# Altium PCB BuckBoost.PcbDoc (part 1 of 2)
Units mil, origin at the board's own origin, x right, y up, seen from the top; angles counter-clockwise.
Board outline 4724.41 x 2755.91 mil, 2 copper layers (Top Layer, Bottom Layer); 131 components, 89 nets, 408 pads, 961 vias.
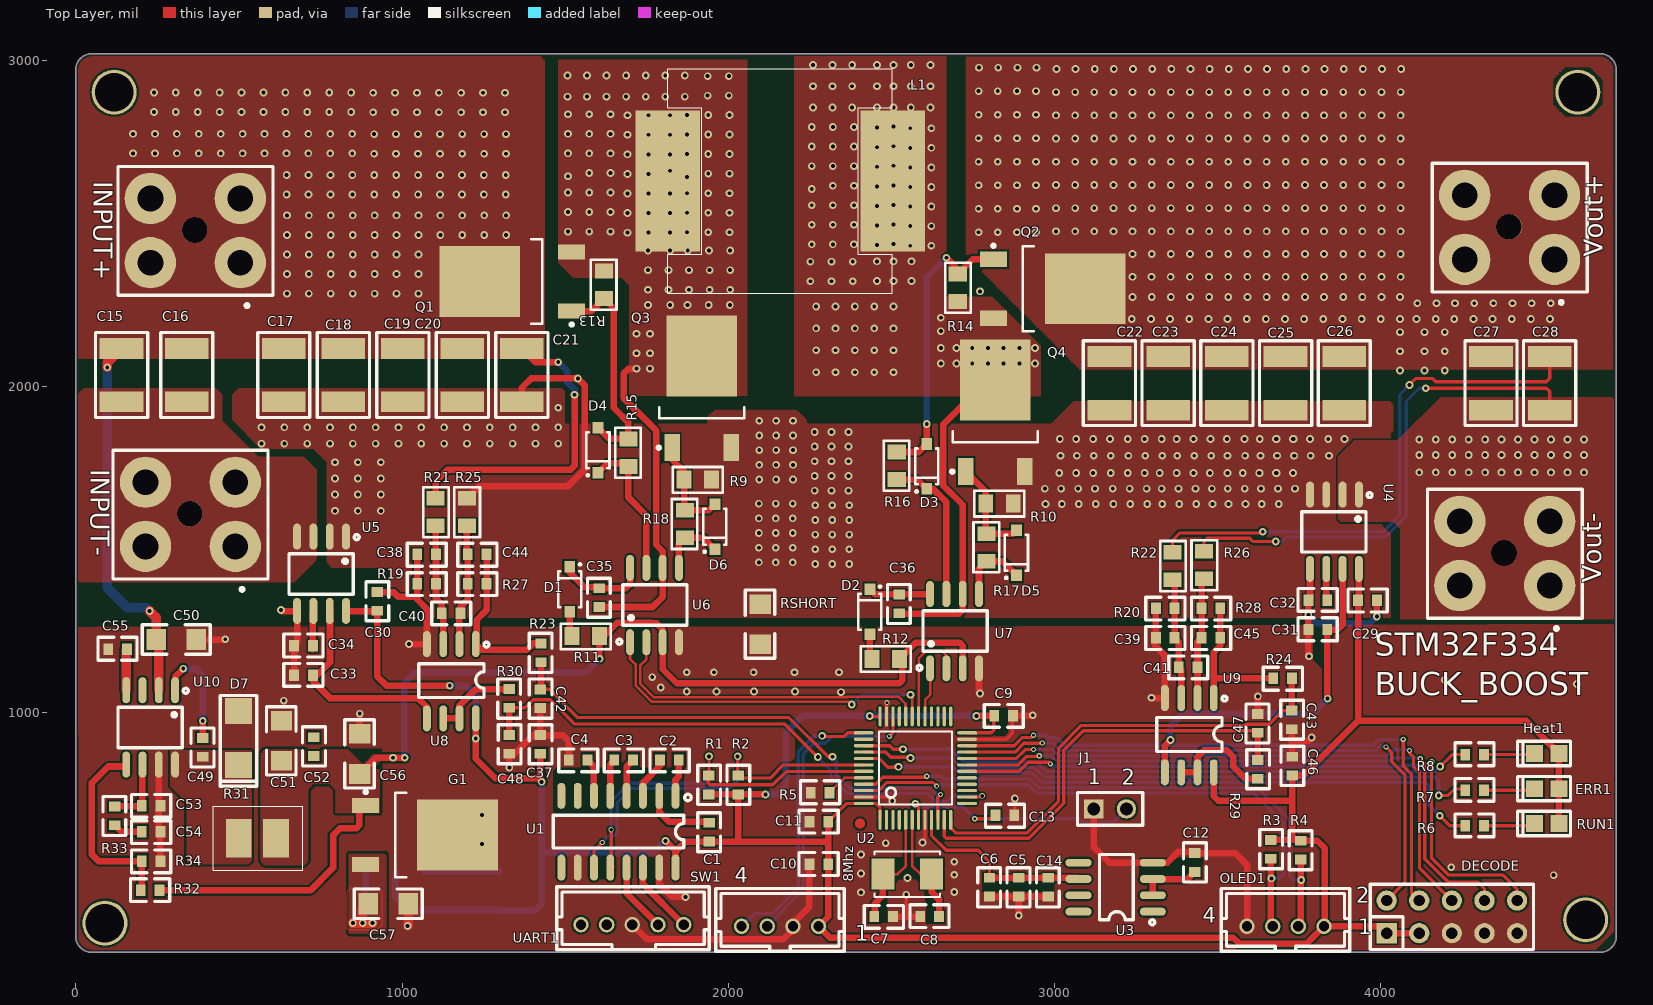
[diagram p0: Top Layer view]
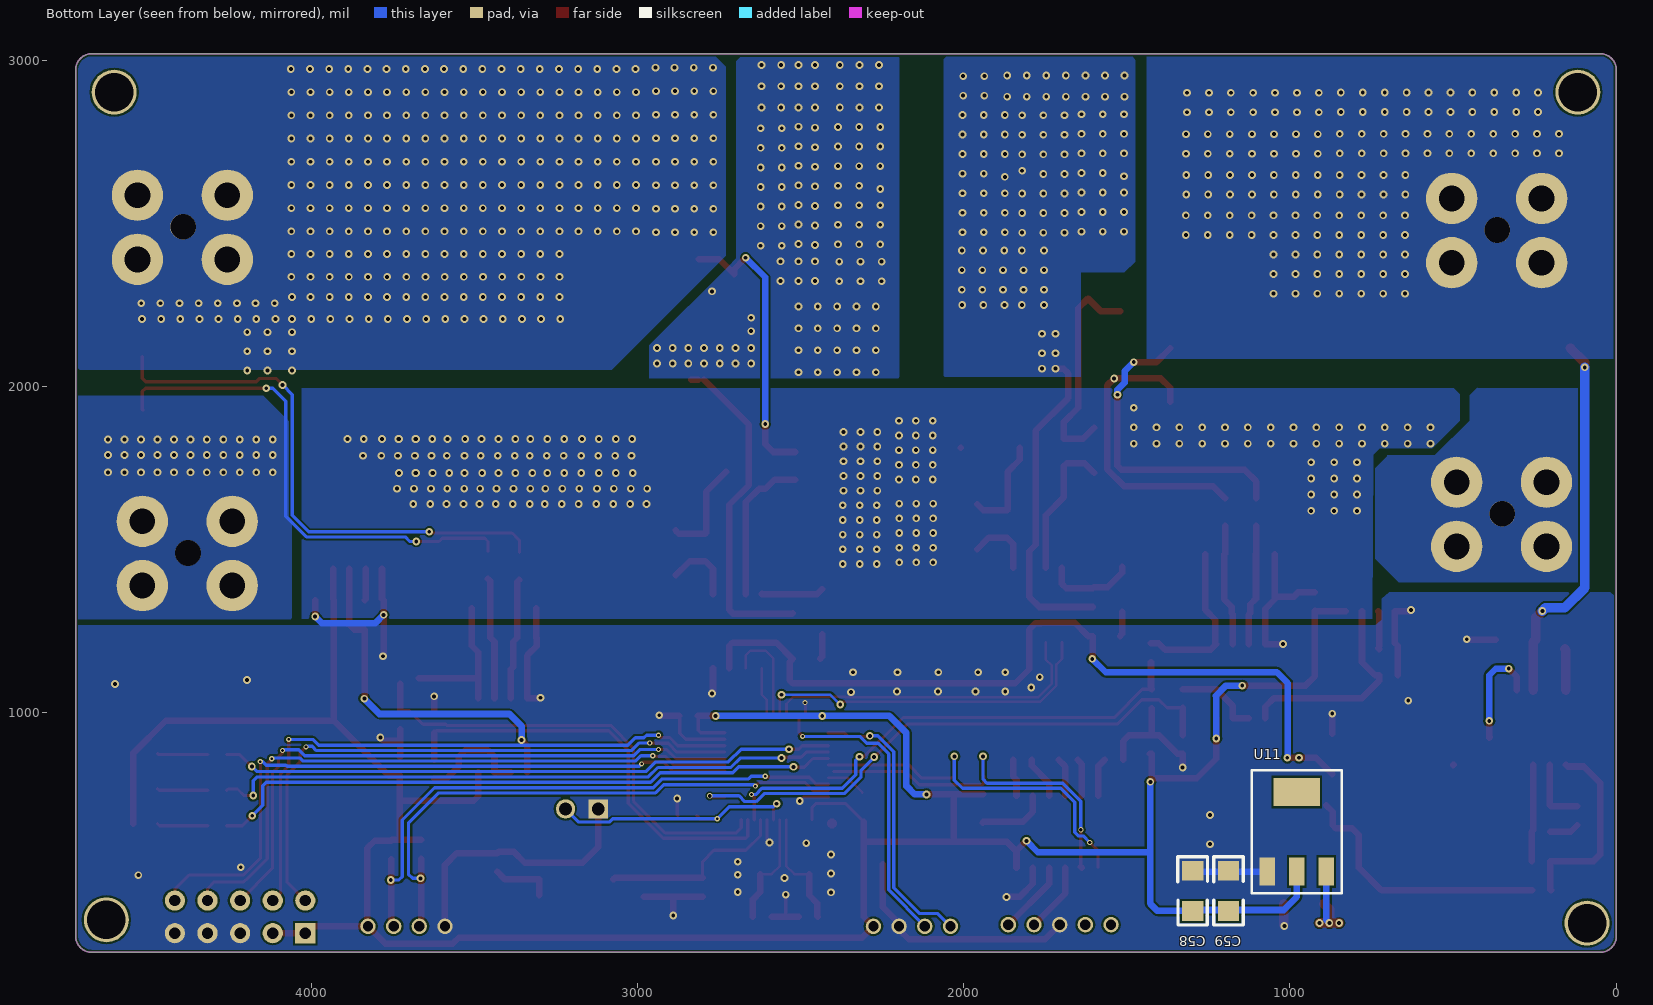
[diagram p1: Bottom Layer view, seen from below]

## Layer stack, top to bottom
Top Solder: solder mask 0.4, Solder Resist, Dk 3.5
Top Layer: signal copper 1.4
Dielectric 1: dielectric 12.6, FR-4, Dk 4.8
Bottom Layer: signal copper 1.4
Bottom Solder: solder mask 0.4, Solder Resist, Dk 3.5

## Board outline
49,265 cw(c49,315) -1,315 -1,2970.91 cw(c49,2970.91) 49,3020.91 4673.41,3020.91 cw(c4673.41,2970.91) 4723.41,2970.91 4723.41,315 cw(c4673.41,315) 4673.41,265

## Design rules (kind name [scope] priority, off if disabled: settings)
Clearance [All] p1: gap=6
PlaneConnect [All] p1: planeconnectstyle=Relief reliefexpansion=20 reliefentries=4 reliefconductorwidth=15 reliefairgap=10
PolygonConnect [(InNet('3.3V') AND InComponent('INPUT_V+1'))] p1: connectstyle=Direct reliefconductorwidth=30 reliefentries=4 polygonreliefangle="90 Angle" airgapwidth=10
PolygonConnect PolygonConnect_1 [All] p2: connectstyle=Direct reliefconductorwidth=20 reliefentries=2 polygonreliefangle="90 Angle" airgapwidth=10
RoutingVias [All] p1: holewidth=28 width=50 viastyle="Through Hole" minholewidth=28 minwidth=50 maxholewidth=28 maxwidth=50
SolderMaskExpansion [All] p1: expansion=4
Width Width_1 [All] p1: maxlimit=30 minlimit=6 preferedwidth=10
Width [All] p2: maxlimit=100 minlimit=99999 preferedwidth=8 toplayer_minwidth=0 bottomlayer_minwidth=0 impedancedriven=TRUE minimp=50.000000 maximp=50.000000 favimp=50.000000 checkconnectedcopper=TRUE
29 further rules are at their usual default settings.

## Classes and differential pairs
component class Power: C15 C16 C17 C18 C19 C20 C21 C22 C23 C24 C25 C26 C27 C28 C29 C30 C31 C32 C33 C34 C35 C36 C37 C38 C39 C40 C41 C42 C43 C44 C45 C46 C47 C48 D1 D2 D3 D4 D5 D6 INPUT+ INPUT- L1 Q1 Q2 Q3 Q4 R9 R10 R11 R12 R13 R14 R15 R16 R17 R18 R19 R20 R21 R22 R23 R24 R25 R26 R27 R28 R29 R30 RSHORT U4 U5 U6 U7 U8 U9 Vout+ Vout-
component class mcu: 8Mhz C1 C2 C3 C4 C5 C6 C7 C8 C9 C10 C11 C12 C13 C14 DECODE ERR1 Heat1 J1 OLED1 R1 R2 R3 R4 R5 R6 R7 R8 RUN1 SW1 U1 U2 U3 UART1
component class amp: C49 C50 C51 C52 C53 C54 C55 C56 C57 C58 C59 D7 G1 R31 R32 R33 R34 U10 U11

## Components (designator, comment, footprint, x,y, rotation, side; value= is the part's Value field where it differs from the comment)
8Mhz "8MHZ" 5032 2549,505 r0 top (schematic designator X1)
C1 "" 0603 1942.33,605 r90 top
C2 "" 0603 1848.54,855 r180 top
C3 "" 0603 1708.47,855 r180 top
C4 "" 0603 1568.4,855 r180 top
C5 "" 0603 2891.11,436 r90 top
C6 "" 0603 2801.1,436 r90 top
C7 "20pF±10%,16V" 0603 2505.53,375 r180 top
C8 "20pF±10%,16V" 0603 2589,375 r0 top
C9 "" 0603 2873.25,991 r180 top
C10 "" 0603 2249,535 r0 top
C11 "" 0603 2249,665 r0 top
C12 "" 0603 3430,569.48 r270 top
C13 "100nF±10%,50V" 0603 2877,685 r180 top
C14 "" 0603 2981.12,436 r90 top
C15 "4.7uF±10%,50V" 1812 139.78,2035 r90 top
C16 "4.7uF±10%,50V" 1812 339.78,2035 r90 top
C17 "4.7uF±10%,50V" 1812 637.27,2035 r90 top
C18 "4.7uF±10%,50V" 1812 819.78,2035 r90 top
C19 "4.7uF±10%,50V" 1812 1002.29,2035 r90 top
C20 "4.7uF±10%,50V" 1812 1184.8,2035 r90 top
C21 "4.7uF±10%,50V" 1812 1367.3,2035 r90 top locked
C22 "4.7uF±10%,50V" 1812 3168.97,2010 r90 top
C23 "4.7uF±10%,50V" 1812 3348.98,2010 r90 top
C24 "4.7uF±10%,50V" 1812 3528.99,2010 r90 top
C25 "4.7uF±10%,50V" 1812 3709,2010 r90 top
C26 "4.7uF±10%,50V" 1812 3889.01,2010 r90 top
C27 "4.7uF±10%,50V" 1812 4338.99,2010 r90 top
C28 "4.7uF±10%,50V" 1812 4519,2010 r90 top
C29 "100nF,16V" 0603 3989,1345 r180 top
C30 "100nF,16V" 0603 923.4,1370 r270 top
C31 "10nf" 0603 3779,1254.99 r0 top
C32 "100nF,16V" 0603 3779,1345 r0 top
C33 "10nf" 0603 669,1114.99 r0 top
C34 "100nF,16V" 0603 669,1205 r0 top
C35 "100nF,16V" 0603 1604.48,1324.07 r90 top
C36 "100nF,16V" 0603 2524.6,1305 r90 top
C37 "" 0603 1424,931.45 r270 top
C38 "" 0603 1104,1485.39 r180 top
C39 "" 0603 3368.93,1229.99 r180 top
C40 "" 0603 1179,1305.37 r180 top
C41 "" 0603 3439,1139.98 r180 top
C42 "" 0603 1424,1071.53 r270 top
C43 "" 0603 3728.4,1006.53 r270 top
C44 "" 0603 1259,1485.39 r180 top
C45 "" 0603 3509,1229.99 r180 top
C46 "" 0603 3729,865 r270 top
C47 "" 0603 3624,938.47 r90 top
C48 "" 0603 1329,931.53 r270 top
C49 "100nf" 0603 389,865 r90 top
C50 "10uf±10%,50V" 1206 369,1225 r180 top
C51 "10uf±10%,50V" 1206 629,975 r270 top
C52 "100nf" 0603 729,925 r270 top
C53 "10pf" 0603 259,715 r180 top
C54 "1nf" 0603 259,635 r180 top
C55 "10nF,16V" 0603 99,1195 r0 top
C56 "10uf±10%,50V" 1206 869,935 r270 top
C57 "10uf±10%,50V" 1206 1019,415 r180 top
C58 "10uf±10%,50V" 1206 1299,515 r270 bottom
C59 "10uf±10%,50V" 1206 1189,515 r270 bottom
D1 "1N4148W" SOD-123 1514,1377.95 r270 top
D2 "1N4148W" SOD-123 2434.12,1310 r270 top
D3 "1N4148W" SOD-123 2609,1755 r90 top
D4 "1N4148W" SOD-123 1600.78,1805 r90 top
D5 "1N4148W" SOD-123 2884,1490 r90 top
D6 "1N4148W" SOD-123 1959,1570.44 r90 top
D7 "SS15" SMA 499,1005 r270 top
DECODE "10芯" IDC-10 4019,324 r0 top
ERR1 "RED" 0805LED 4510,767 r180 top
G1 "LM78M05CDT" TO-252 1029,625 r270 top
Heat1 "翠绿色" 0805LED 4510,874.99 r180 top
INPUT+ "AO-08/4J-N1" A076 504,2380 r90 top (schematic designator INPUT_V+1)
INPUT- "AO-08/4J-N1" A076 489,1510 r90 top (schematic designator INPUT_V-1)
J1 "1*2Pin" HDR1X2 3121,705.01 r0 top
L1 "1mhH  6A" 1770-inductor 2159,2630 r0 top locked
OLED1 "4针" SIP-4 3709,345 r180 top
Q1 "IRFR1205PBF" TO-252AA 1379,2322.23 r90 top
Q2 "IRFR1205PBF" TO-252AA 2954,2300 r270 top
Q3 "IRFR1205PBF" TO-252AA 1919,1953.42 r0 top
Q4 "IRFR1205PBF" TO-252AA 2819,1880 r0 top
R1 "" 0603 1940.33,807 r270 top
R2 "" 0603 2030.34,807 r270 top
R3 "" 0603 3664,610 r270 top
R4 "" 0603 3756.01,550 r90 top
R5 "10R±1%,0603" 0603 2253.4,755.01 r0 top
R6 "" 0603 4260,653.59 r0 top
R7 "" 0603 4260,762.09 r0 top
R8 "" 0603 4260,871.59 r0 top
R9 "10K" 0805r 1949,1715 r180 top
R10 "10K" 0805r 2874,1641.58 r180 top
R11 "Rboot" 0805r 1605.23,1235 r180 top
R12 "Rboot" 0805r 2525.23,1165 r180 top
R13 "10K" 0805R 1619.03,2270 r90 top
R14 "10K" 0805r 2704,2345 r270 top
R15 "10K±0.1%,0805" 0805r 1694,1755 r90 top
R16 "10K±0.1%,0805" 0805r 2517.19,1715 r90 top
R17 "10K±0.1%,0805" 0805r 2792.19,1464.69 r90 top
R18 "10K±0.1%,0805" 0805r 1867.19,1536.31 r90 top
R19 "10K±5%,0603" 0603 1104,1395.38 r180 top
R20 "10K±5%,0603" 0603 3368.93,1320 r180 top
R21 "10K±0.1%,0805" 0805r 1102.73,1657.34 r270 top
R22 "10K±0.1%,0805" 0805r 3362.73,1491.95 r270 top
R23 "100R" 0603 1426,1155 r90 top
R24 "100R" 0603 3729,1105 r180 top
R25 "10K±0.1%,0805" 0805r 1199,1657.34 r270 top
R26 "10K±0.1%,0805" 0805r 3459,1495 r270 top
R27 "10K±5%,0603" 0603 1259,1395.38 r180 top
R28 "10K±5%,0603" 0603 3509,1320 r180 top
R29 "100R" 0603 3624,855 r270 top
R30 "100R" 0603 1329,1015 r90 top
R31 "1mH,800mA" 0603_induct 499,615 r0 top
R32 "10K" 0603 199,455 r0 top
R33 "26K" 0603 119,655 r90 top
R34 "740" 0603 259,545 r180 top
RSHORT "0R±1%,1206" 1206 2097,1333 r270 top
RUN1 "翠绿色" 0805LED 4510,660 r180 top
SW1 "4针" SIP-4 2159,345 r180 top
U1 "MAX3232ESE" SOP-16 1838.4,745.15 r180 top
U2 "STM32F334C8T6" LQFP48_L 2574,830 r90 top locked
U3 "REF193GS" SO-8 3302,390 r180 top
U4 "ACS724" SOIC-8 3859,1555 r270 top
U5 "ACS724" SOIC-8 753,1426 r270 top
U6 "UCC27712" SOIC-8 1774,1330 r90 top
U7 "UCC27712" SOIC-8 2694,1250 r90 top
U8 "LM2904D" SO-8 1226,1210.36 r270 top
U9 "LM2904D" SO-8 3489,1044.97 r270 top
U10 "TPS54331" SOIC-8 229,955 r270 top
U11 "SPX1117M3-L-1-5" SOT-223 979,635 r180 bottom
UART1 "5针" SIP-5-2 1863.4,350 r180 top
Vout+ "AO-08/4J-N1" A076 4534,2390 r90 top locked (schematic designator VOUT_V+1)
Vout- "AO-08/4J-N1" A076 4519,1390 r90 top (schematic designator VOUT_V-1)

## Footprints (in the part's own frame and the unit in brackets; to place one, negate y for a bottom-side part, rotate by r counter-clockwise, add the part's x,y. Pads: shape width x height; smd on the part's side, far side on the other; paste and mask are expansions set on the pad)
0603 [mil] "SMD0603"
  rect 30x35 smd: 1(0,0) 2(57.56,0)
  silkscreen extent -32,-34 88,36
0603_induct [mm]
  rect 2x3 smd: 1(0,0) 2(2.9,0)
  silkscreen extent -2,-2.5 5,2.5
0805LED [mm]
  rect 1.3x1.3 smd: 1(-0.95,0) 2(0.95,0)
  silkscreen extent -1.85,-0.95 2.29,0.95
0805r [mil]
  rect 45x56 smd: 1(0,0) 2(84.37,0)
  silkscreen extent -34,-38 119,40, body extent 4,-25 82,25, height 20
0805R [mil]
  rect 45x56 smd: 1(0,0) 2(84.37,0)
  silkscreen extent -34,-38 119,40, body extent 4,-25 82,25, height 20
1206 [mil]
  rect 60x65 smd: 1(0,1) 2(122.99,1)
  silkscreen extent -43,-45 166,46, body extent -1,-31 125,32, height 37
1770-inductor [mm]
  rect 5x11 smd: 1(-8.75,0) 2(8.776,0)
  silkscreen extent -8.76,-8.75 8.75,8.75
1812 [mm] "Chip ; Body 4.5 x 3.2 mm (LxW typ)"
  rect 1.6x3.4 smd: 1(-2.087,0)
  rect 1.65x3.4 smd: 2(2.087,0)
  silkscreen extent -3.29,-2.03 3.31,2.03, body extent -2.1,-1.47 2.4,1.73, height 1.6
5032 [mm] "5.0mm*3.2mm*1.5mm"
  rect 1.8x2.4 smd: 1(-1.9,0) 2(1.9,0)
  silkscreen extent -2.54,-1.78 2.54,1.78
A076 [mm]
  round 4 hole 2: 1(-0.003,0.002) 2(4.997,0.002) 3(4.997,7.002) 4(-0.003,7.002)
  round 2 hole 2: 5(2.537,3.558)
  silkscreen extent -3.49,-2.54 7.49,9.53
HDR1X2 [mm] "Connector; Header; 2 Position"
  rect 1.5x1.5 hole 1: 1(0,0)
  round 1.5 hole 1: 2(2.54,0)
  silkscreen extent -1.27,-1.27 3.81,1.27, body extent -1.27,-1.27 3.81,1.27, height 6.54
IDC-10 [mil]
  rect 62x62 hole 35: 1(0,0)
  round 62 hole 35: 2(0,100) 3(100,0) 4(100,100) 5(200,0) 6(200,100) 7(300,0) 8(300,100) 9(400,0) 10(400,100)
  silkscreen extent -50,-50 450,150
LQFP48_L [mm] "Thin QFP, 48-Leads, Body 7x7mm, Pitch 0.5mm, IPC High Density"
  oval 1.55x0.25 smd: 1(-4.025,2.75) 2(-4.025,2.25) 3(-4.025,1.75) 4(-4.025,1.25) 5(-4.025,0.75) 6(-4.025,0.25) 7(-4.025,-0.25) 8(-4.025,-0.75) 9(-4.025,-1.25) 10(-4.025,-1.75) 11(-4.025,-2.25) 12(-4.025,-2.75) 25(4.025,-2.75) 26(4.025,-2.25) 27(4.025,-1.75) 28(4.025,-1.25) 29(4.025,-0.75) 30(4.025,-0.25) 31(4.025,0.25) 32(4.025,0.75) 33(4.025,1.25) 34(4.025,1.75) 35(4.025,2.25) 36(4.025,2.75)
  oval 0.25x1.55 smd: 13(-2.75,-4.025) 14(-2.25,-4.025) 15(-1.75,-4.025) 16(-1.25,-4.025) 17(-0.75,-4.025) 18(-0.25,-4.025) 19(0.25,-4.025) 20(0.75,-4.025) 21(1.25,-4.025) 22(1.75,-4.025) 23(2.25,-4.025) 24(2.75,-4.025) 37(2.75,4.025) 38(2.25,4.025) 39(1.75,4.025) 40(1.25,4.025) 41(0.75,4.025) 42(0.25,4.025) 43(-0.25,4.025) 44(-0.75,4.025) 45(-1.25,4.025) 46(-1.75,4.025) 47(-2.25,4.025) 48(-2.75,4.025)
  Top Layer region: -3.943,4.252 -3.937,4.318 -3.943,4.384 -3.96,4.448 -3.988,4.508 -4.026,4.563 -4.073,4.61 -4.127,4.648 -4.188,4.676 -4.252,4.693 -4.318,4.699 -4.384,4.693 -4.448,4.676 -4.508,4.648 -4.563,4.61 -4.61,4.563 -4.648,4.508 -4.676,4.448 -4.693,4.384 -4.699,4.318 -4.693,4.252 -4.676,4.188 -4.648,4.127 -4.61,4.073 -4.563,4.026 -4.508,3.988 -4.448,3.96 -4.384,3.943 -4.318,3.937 -4.252,3.943 -4.188,3.96 -4.127,3.988 -4.073,4.026 -4.026,4.073 -3.988,4.127 -3.96,4.188
  silkscreen extent -2.85,-2.85 2.85,2.85, body extent -3.5,-3.5 3.5,3.5, height 1.6
SIP-4 [mm]
  round 1.2 hole 0.8: 1(-3,0) 2(-1,0) 3(1,0) 4(3,0)
  silkscreen extent -5,-2.95 5,1.95, body extent -4.97,-2.79 4.93,1.71, height 6
SIP-5-2 [mm]
  round 1.2 hole 0.8: 1(0,0) 2(2,0) 3(4,0) 4(6,0) 5(8,0)
  silkscreen extent -2,-2.95 9.88,1.95
SMA [mm]
  rect 2x2.1 smd: 1(0,0) 2(4.2,0)
  silkscreen extent -1.22,-1.44 5.86,1.41, body extent -0.5,-1.32 4.7,1.28, height 2.5
SO-8 [mil]
  oval 80x24 smd: 1(0,0) 2(0,-50) 3(0,-100) 4(0,-150) 5(227.87,-150) 6(227.87,-100) 7(227.87,-50) 8(227.87,0)
  silkscreen extent -6,-175 164,40, body extent -4,-171 232,21, height 67
SOD-123 [mm]
  rect 0.9x0.85 smd: 1(1.75,0.003) 2(-1.75,0.003)
  silkscreen extent -2.03,-0.9 1.4,0.9, body extent -1.85,-0.8 1.85,0.8, height 1.25
SOIC-8 [mil]
  oval 80x24 smd: 1(-113.94,75) 2(-113.94,25) 3(-113.94,-25) 4(-113.94,-75) 5(113.94,-75) 6(113.94,-25) 7(113.94,25) 8(113.94,75)
  silkscreen extent -120,-100 63,115, body extent -117,-99 119,94, height 67
SOP-16 [mil]
  oval 24x80 smd: 1(0,0) 2(50,0) 3(100,0) 4(150,0) 5(200,0) 6(250,0) 7(300,0) 8(350,0) 9(350,220) 10(300,220) 11(250,220) 12(200,220) 13(150,220) 14(100,220) 15(50,220) 16(0,220)
  silkscreen extent -48,-5 375,160, body extent -20,-13 372,229, height 74
SOT-223 [mm] "电源芯片-AS1117M3-X"
  rect 1.2x2.2 smd: 1(-2.3,-3.1) 2(0,-3.1) 3(2.3,-3.1)
  rect 3.6x2.2 smd: 4(0,3.1)
  silkscreen extent -3.5,-4.8 3.5,4.8, body extent -3.25,-3.5 3.25,3.46, height 1.4
TO-252 [mm]
  rect 1.2x2.1 smd: 1(-2.3,-3.575) 3(2.3,-3.575)
  rect 5.5x6.3 smd: 2(0,3.575)
  silkscreen extent -3.47,-3.7 3.3,-0.43, body extent -3.37,-3.92 3.37,6.18, height 2.37
TO-252AA [mm]
  rect 5.5x6.3 smd: D(0,3.575)
  rect 1.2x2.1 smd: G(-2.3,-3.575) S(2.3,-3.575)
  silkscreen extent -3.47,-3.7 3.3,-0.42, body extent -3.37,-3.92 3.37,6.18, height 2.37

## Part data
8Mhz: library part XTAL_SMD
C1 C2 C3 C4 C5 C6 C9 C10 C11 C12 C13 C14 C37 C38 C39 C40 C41 C42 C43 C44 C45 C46 C47 C48: library part 贴片电容,0603,100nF±10%,50V, "贴片电容"
C7 C8: library part 贴片电容,0603,20pF±10%,16V, "贴片电容"
C15 C16 C17 C18 C19 C20 C21 C22 C23 C24 C25 C26 C27 C28: library part 贴片电容,1812,4.7uF±10%,50V,X7R系列,TDK, "贴片电容"
C29 C30 C31 C32 C33 C34 C35 C36: library part 贴片电容,0603,100nF,16V, "贴片电容"
C49 C52 C53 C54 C55: library part 贴片电容,0603,10nF±10%,16V, "贴片电容"
C50 C51 C56 C57 C58 C59: library part 贴片电容,1206,10uf±10%,50V, "贴片电容"
D1 D2 D3 D4 D5 D6: library part 整流二极管,1N4148W,100V,150mA,SOD-123, "整流二极管"
D7: library part 肖特基二极管,SS15,50V,1A,SMA, "肖特基二极管"
DECODE: library part 双列排针母座,10芯,2.54mm, "双列排针母座"
ERR1 Heat1 RUN1: library part 发光二极管,翠绿色,JLF-0805-1-GC,0805, "发光二极管"
G1: library part 电压转换器,LM78M05CDT,TO-252, "电压转换器"
INPUT+ INPUT- Vout+ Vout-: library part AO-08/4J-N1，7.8X7.8mm,DIP-4,M3螺纹孔,中心距5X7mm,表面镀锡, "PCB接线端子"
J1: library part 单列直脚排针,2芯,2.54mm,HDR1X2, "单列直脚排针"
L1 R31: library part 1mH,800mA,0810, "贴片电感"
OLED1 SW1: library part 条形连接器,PH(2.0),4针直针,间距2.00mm,SIP-4, "条形连接器"
Q1 Q2 Q3 Q4: library part MOSFET功率管,IRFR1205PBF,55V,44A,27mR,NPN,TO-252AA, "MOSFET功率管"
R1 R2 R3 R4 R5 R6 R7 R8: library part 10R±1%,1/10W,0603, "贴片电阻"
R9 R10 R11 R12 R13 R14: library part 4.7R±1%,MEF0207,0.5W,25PPM,品牌:EBG, "圆柱形精密贴片电阻"
R15 R16 R17 R18 R21 R22 R25 R26: library part 10K±0.1%,1/8w,0805, "贴片电阻"
R19 R20 R23 R24 R27 R28 R29 R30: library part 10K±5%,1/10W,0603, "贴片电阻"
R32 R33 R34: library part 6.2K±1%,1/10W,0603, "贴片电阻"
RSHORT: library part 0R±5%,1/4W,1206, "贴片电阻"
U1: library part RS232收发器,MAX3232ESE，SOP-16, "RS232收发器"
U2: library part STM32F334Cx, "STM32F334Cx"
U3: library part 电源基准芯片,REF193GS,3V,±10mV,SO-8, "电源基准芯片"
U4 U5: "电流传感器"
U8 U9: library part 运算放大器,LM2904D,SO-8, "运算放大器"
U10: library part TPS54331-sop8
U11: library part 电压转换器,SPX1117M3-L-1-5,SOT-223,环保, "电压转换器"
UART1: library part 条形连接器,PH(2.0),5针直针,间距2.00mm,SIP-5-2, "条形连接器"

## Free pads (board coordinates)
  round 137.8 hole 118.11: 0(89,355) 0(117.11,2902.8) 0(4605.3,2902.8) 0(4629,365)

## Via types
v1: diameter 23.62, hole 11.81, Top Layer to Bottom Layer, tented both sides, 942 vias
v2: diameter 16, hole 8, Top Layer to Bottom Layer, tented both sides, 16 vias
v3: diameter 16, hole 10, Top Layer to Bottom Layer, tented both sides, 2 vias
v4: diameter 16, hole 11.81, Top Layer to Bottom Layer, tented both sides, 1 vias

## Nets (pads, with @x,y where several pads share a name; then routed paths per layer and width w, separated by ;. In a path a pad name is that pad's centre, name@x,y a point inside that pad or via, vN(x,y) a via of type N, cw(c..) or ccw(c..) an arc to the next point about the centre after c; other vN are vias at no path point)
3.3V: C1.1 C9.2 C10.2 C11.2 C29.2 C30.2 C37.2 C46.2 C58.2 C59.2 DECODE.1 DECODE.3 ERR1.1 Heat1.1 OLED1.1 R1.2 R2.2 R3.1 R4.2 RUN1.1 SW1.1 U1.16 U2.1 U2.24 U2.36 U2.48 U4.8 U5.8 U8.8 U9.8 U11.2 | length 9471.8
  Top Layer w10: C11.2@2306.56,665 2363.29,721.73 U2.48@2415.54,721.73 2452.27,721.73 2465.73,708.27 U2.1@2465.73,671.54 ; v1(2434,990) 2435.54,988.46 U2.36@2465.73,988.46 ; U2.24@2732.46,938.27 2806.27,938.27 2814,946 2814,989.31 C9.2@2815.69,991
  Top Layer w20: U5.8@829,1311.06 922.02,1311.06 C30.2@923.4,1312.44 923.4,1111.6 952,1083 v1(1146,1083) ; U8.8@1226,982.49 v1(1226,920.74) 1226,859 1286,799 1417,799 v1@1424,792 ; v1(1428,788) v1@1424,792 ; C37.2@1430.11,873.89 C37.2@1424,873.89 v1@1424,792 ; v1(1808,607) 1838.4,576.6 1838.4,574.4 ; U1.16@1838.4,525.15 1838.4,574.4 ; R1.2@1940.33,749.44 R2.2@2030.34,749.44 ; v1(2114.56,749.44) R2.2@2030.34,749.44 ; C11.2@2306.56,665 2306.56,595 ; v1(2761,990) 2762,991 C9.2@2815.69,991 ; U9.8@3489,817.1 3489,744 3503,730 3729,730 ; R3.1@3664,610 3730,610 ; U4.8@3934,1441.06 3934,1347.56 C29.2@3931.44,1345 3931.44,975.44 ; DECODE.3@4119,324 DECODE.1@4019,324 3998,345 OLED1.1@3827.11,345 ; RUN1.1@4547.4,660 ERR1.1@4547.4,767 Heat1.1@4547.4,874.99 4446.95,975.44 3931.44,975.44 ; 1838.4,574.4 1869,605 C1.1@1942.33,605 2028,605 ; 2028,605 2030.34,607.34 R2.2@2030.34,749.44 ; 2028,605 2296.56,605 2306.56,595 ; 2306.56,595 2306.56,374.45 SW1.1@2277.11,345 2312.11,310 3549,310 3567,292 3774.11,292 OLED1.1@3827.11,345 ; 3729,730 C46.2@3729,807.44 3763.44,807.44 3931.44,975.44 ; 3729,730 3729,611 3730,610 ; 3730,610 3753.57,610 R4.2@3756.01,607.56 3806.44,607.56 3829,585 3829,346.89 OLED1.1@3827.11,345
  Bottom Layer w20: U11.2@979,512.95 979,435 1019,395 1295.01,395 C58.2@1298,392.01 1406.01,392.01 1429,415 1429,572 ; v1(1146,1083) 1196,1083 1227,1052 1226,1051 v1(1226,920.74) ; v1@1429,785 1429,572 ; v1(1808,607) 1773,572 1429,572 ; v1(2114.56,749.44) 2150.44,749.44 2176,775 2176,938 2228,990 v1(2434,990) v1(2761,990)
+12V: C51.2 C56.2 G1.1 R11.1 R12.1 R31.2 R32.2 U6.3 U7.3 | length 3365.7
  Top Layer w20: R32.2@256.56,455 719,455 789,525 789,625 809,645 859,645 869,655 869,696.3 G1.1@888.25,715.55 ; C56.2@870,812.01 919.99,862 v1(972,862) v1(1008,862) ; v1(1606,1165) 1605.23,1165.77 R11.1@1605.23,1235 1619,1235 1660.06,1276.06 1762.25,1276.06 1763.32,1275 1779,1275 1799,1255 U6.3@1799,1216.06 1799,1133 1842,1090 2525,1090 2534,1099 2534,1156.23 R12.1@2525.23,1165 2575.23,1215 2709,1215 2719,1205 U7.3@2719,1136.06
  Bottom Layer w20: v1(1008,862) 1007,863 1007,1091 1040,1124 1565,1124 v1(1606,1165)
AGND: C17.1 C18.1 C19.1 C20.1 C21.1 C22.1 C23.1 C24.1 C25.1 C26.1 Q3.S Q4.S R9.1 R10.1 R25.1 RSHORT.1 U4.3 U4.4 U5.1 U5.2 | length 913.9
  Top Layer w20: R25.1@1199,1657.34 1236.66,1695 1509,1695 1560.81,1746.81 1560.81,2003.19 v1(1539,2025) 1396,2025 1367.3,1996.3 C21.1@1367.3,1952.82 ; Q3.S@2009,1812.12 Q3.S@2009.55,1812.68
  other v1: 2267,1456 2319,1456 2371,1456 2094,1461 2146,1461 2198,1461 2267,1501 2319,1501 2371,1501 2094,1506 2146,1506 2198,1506 2267,1546 2319,1546 2371,1546 2094,1551 2146,1551 2198,1551 2267,1591 2319,1591 2371,1591 2094,1596 2146,1596 2198,1596 794,1619 864.5,1619 935,1619 2267,1636 2319,1636 2371,1636 2973,1640 3023,1640 3075,1640 3127,1640 3181,1640 3233,1640 3285,1640 3331,1640 3383,1640 3435,1640 3485,1640 3534,1640 3586,1640 3636,1640 3688,1640 2094,1641 2146,1641 2198,1641 794,1669 864.5,1669 935,1669 2265,1681 2317,1681 2369,1681 2971,1687 3021,1687 3073,1687 3125,1687 3179,1687 3231,1687 3283,1687 3329,1687 3381,1687 3433,1687 3483,1687 3532,1687 3584,1687 3634,1687 3686,1687 3738,1687 2095,1715 2147,1715 2199,1715 794,1718 864.5,1718 935,1718 2265,1726 2317,1726 2369,1726 3015,1735 3067,1735 3119,1735 3173,1735 3225,1735 3277,1735 3323,1735 3375,1735 3427,1735 3477,1735 3531,1735 3578,1735 3628,1735 3630,1735 3680,1735 3682,1735 3732,1735 2095,1760 2147,1760 2199,1760 794,1768 864.5,1768 935,1768 2265,1771 2317,1771 2369,1771 3019,1788 3069,1788 3121,1788 3173,1788 3227,1788 3279,1788 3331,1788 3377,1788 3429,1788 3481,1788 3531,1788 3585,1788 3632,1788 3682,1788 3684,1788 3734,1788 3736,1788 3786,1788 3842,1788 2095,1805 2147,1805 2199,1805 2265,1816 2317,1816 2369,1816 569,1825 639,1825 709,1825 779,1825 849,1825 919,1825 989,1825 1059,1825 1129,1825 1199,1825 1269,1825 1339,1825 1409,1825 1479,1825 3017,1839 3067,1839 3119,1839 3171,1839 3225,1839 3277,1839 3329,1839 3375,1839 3427,1839 3479,1839 3529,1839 3583,1839 3630,1839 3680,1839 3682,1839 3732,1839 3734,1839 3784,1839 3840,1839 3890,1839 2095,1850 2147,1850 2199,1850 2265,1861 2317,1861 2369,1861 569,1875 639,1875 709,1875 779,1875 849,1875 919,1875 989,1875 1059,1875 1129,1875 1199,1875 1269,1875 1339,1875 1409,1875 1479,1875 2095,1895 2147,1895 2199,1895 1479,1935
ERR_RED: R7.1 U2.40 | length 1935.9
  Top Layer w10: U2.40@2415.54,879.21 2482.79,879.21 2499,863 2557,863 v1(2559,861) ; v1(4179,746) 4207,746 4227,766 4256.09,766 R7.1@4260,762.09
  Bottom Layer w10: v1(2559,861) 2685.96,861 2714.96,832 2937.96,832 2966.96,803 4167,803 4179,791 v1(4179,746)
EXTERN_SENSOR: U2.13
GND: C4.2 C5.1 C6.1 C7.1 C8.1 C9.1 C10.1 C11.1 C12.1 C13.1 C14.1 C29.1 C30.1 C31.1 C32.1 C33.1 C34.1 C37.1 C38.2 C39.2 C42.2 C43.2 C46.1 C47.2 C48.2 C50.1 C51.1 C53.1 C54.1 C55.1 C56.1 C57.1 C58.1 C59.1 D7.1 DECODE.5 DECODE.7 DECODE.9 G1.2 J1.1 OLED1.4 R5.1 R19.2 R20.2 R34.1 RSHORT.2 SW1.2 U1.10 U1.15 U2.8 U2.23 U2.35 U2.47 U3.4 U4.5 U5.5 U6.4 U7.4 U8.4 U9.4 U10.7 U11.1 UART1.3 | length 5660.5
  Top Layer w10: U2.47@2415.54,741.42 2490.58,741.42 v1(2503,729) ; U2.35@2485.42,988.46 2485.42,1029.42 v2(2487,1031) ; 2544,375 2546,377 v1(2546,442) ; v1(2596,602) 2603.53,609.53 U2.8@2603.53,671.54 ; U2.23@2732.46,918.58 2852.58,918.58 2871,937 2871,988.75 C9.1@2873.25,991 ; C13.1@2877,685 2879,687 v1(2879,737)
  Top Layer w20: U10.7@254,841.06 254,640 C54.1@259,635 R34.1@259,545 ; C50.1@369,1224 457,1224 v1(458,1225) ; v1(629,1315) 632.94,1311.06 679,1311.06 679,1215 C34.1@669,1205 C33.1@669,1114.99 ; C56.1@870,935 v1(870,997) ; C30.1@923.4,1370 974,1370 989,1355 1039,1355 1046.44,1347.56 ; v1(1017,346) v1@1019,348 ; v1(1021,1210.36) U8.4@1076,1210.36 1076,1318 1046.44,1347.56 ; C38.2@1046.44,1485.39 R19.2@1046.44,1395.38 1046.44,1347.56 ; v1(1329,832) C48.2@1329,873.97 1344.97,873.97 1402.45,931.45 C37.1@1424,931.45 ; C42.2@1424,1013.97 C37.1@1424,931.45 ; C4.2@1510.84,855 1510.84,913.16 1492.55,931.45 C37.1@1424,931.45 ; UART1.3@1705.92,350 1750.92,305 2169,305 2198.37,334.37 SW1.2@2198.37,345 2198.37,354.37 2249,405 C10.1@2249,535 ; U1.15@1788.4,525.15 1788.4,475.6 1829,435 v1(1869,435) ; C7.1@2505.53,375 2544,375 C8.1@2589,375 ; U7.4@2769,1136.06 2769,1062 v1(2772,1059) ; C6.1@2801.1,436 C5.1@2891.11,436 ; C9.1@2873.25,991 2933,991 v1(2934,992) ; v1@2891,378 v1(2891.11,378.11) C5.1@2891.11,436 ; C14.1@2981.12,436 C5.1@2891.11,436 ; J1.1@3121,705.01 3121,588 3169,540 U3.4@3302,540 3346,540 3379,573 3426.48,573 C12.1@3430,569.48 3554.52,569.48 3590.89,533.11 OLED1.4@3590.89,345 ; v1(3298,1046) 3299.03,1044.97 U9.4@3339,1044.97 3339,1175 3309,1205 3309,1227.62 C39.2@3311.37,1229.99 R20.2@3311.37,1320 ; C47.2@3624,996.03 v1(3624,1050) ; C43.2@3728.4,948.97 3728.4,914 ; C46.1@3729,865 3728.4,865.6 3728.4,914 ; v1(3781,1173) 3779,1175 C31.1@3779,1254.99 v1(3779,1299.99) C32.1@3779,1345 3784,1350 U4.5@3784,1441.06 ; v1(3789,924) 3779,914 3728.4,914 ; v1(3989,1295) C29.1@3989,1345
  Top Layer w30: v1@1019,348 C57.1@1019,414
  Bottom Layer w20: U11.1@1069.55,512.95 1295.95,512.95 C58.1@1298,515 ; v1(3779,1299.99) 3803.99,1275 3969,1275 v1(3989,1295)
  other v1: 2407,449 2693,450 2550,493 4531,502 2693,503 2407,507 4217,526 2693,543 2407,565 1245,597 2483,600 1245,686 637,1037 2346,1063 1873,1065 1964,1065 2079,1065 2205,1065 1793,1077 4603,1088 4198,1100 1767,1109 1873,1124 1956,1124 2078,1124 2203,1124 2340,1124
HEATBET: R8.1 U2.39 | length 1898.5
  Top Layer w10: U2.39@2415.54,898.9 2495.1,898.9 2506,888 v1(2536,888) ; v1(4183,835) 4219.59,871.59 R8.1@4260,871.59
  Bottom Layer w10: v1(2536,888) 2683,888 2722,849 2945,849 2974,820 4168,820 v1(4183,835)
HRTIM1_CHA1: U2.29 U7.1 | length 157.2
  Top Layer w8: U2.29@2604.29,985 2604.29,1040.29 2619,1055 U7.1@2619,1136.06
HRTIM1_CHA2: U2.30 U7.2 | length 317.6
  Top Layer w8: U2.30@2583.84,988.46 2583.84,1165.67 2608.23,1190.06 2653.94,1190.06 2669,1175 U7.2@2669,1136.06
HRTIM1_CHB1: U2.31 U6.1 | length 1088.1
  Top Layer w8: U6.1@1699,1216.06 1699,1165 1716,1148 1716,1083.2 1766.2,1033 2371,1033 v1(2379,1025) ; v1(2559,1055) 2564.16,1049.84 U2.31@2564.16,988.46
  Bottom Layer w8: v1(2379,1025) 2409,1055 v1(2559,1055)
HRTIM1_CHB2: U2.32 U6.2 | length 1015.1
  Top Layer w8: U6.2@1749,1216.06 1749,1163 1730,1144 1730,1089 1772,1047 2362,1047 2364,1049 2522.14,1049 2543.71,1027.43 2543.71,989.23 U2.32@2544.47,988.46
HRTIM1_CHC1: U2.25
HRTIM1_CHC2: U2.26
HRTIM1_CHD1: U2.27
HRTIM1_CHD2: U2.28
HRTIM1_FLT1: U2.33
I2C_SCL: OLED1.2 R4.1 U2.45 | length 1793.3
  Top Layer w10: U2.45@2415.54,780.79 2452.79,780.79 2474,802 2606,802 v2(2609,805)
  Top Layer w20: OLED1.2@3748.37,345 3756.01,352.64 R4.1@3756.01,550
  Bottom Layer w10: v2(2609,805) 2652,805 2660,797 2924.63,797 2951.63,770 3623,770 3722,671 3722,497 3732,487 v1(3757,487)
I2C_SDA: OLED1.3 R3.2 U2.46 | length 1761
  Top Layer w10: U2.46@2415.54,761.1 2461.1,761.1 2486,786 2628,786 v2(2639,775)
  Top Layer w20: R3.2@3664,552.44 3664,350.63 OLED1.3@3669.63,345
  Bottom Layer w10: v2(2639,775) 2643,779 2920,779 2945,754 3610,754 3703,661 3703,505 3690,492 v1(3666,492)
I_SENSOR: C47.1 R29.1 U2.11 | length 1332.3
  Top Layer w10: U2.11@2662.58,671.54 2662.58,621.42 2669,615 2921.63,615 3029,722.37 3029,885 3089,945 3617.47,945 C47.1@3624,938.47
  Top Layer w20: R29.1@3624,855 C47.1@3624,938.47
IIN: C33.2 U5.7 U8.5 | length 660.5
  Top Layer w20: U5.7@779,1311.06 779,1155 738.99,1114.99 C33.2@726.56,1114.99 726.56,1097.44 779,1045 1049,1045 1076,1018 U8.5@1076,982.49
IIN_SENSOR: C48.1 R30.1 U2.14 | length 1740.6
  Top Layer w10: R30.1@1329,1015 1376.98,1015 1401.94,1039.97 1454.03,1039.97 1529,965 2174,965 v1(2275,864) ; U2.14@2732.46,741.42 2775.42,741.42 v4(2779,745)
  Top Layer w20: C48.1@1329,931.53 R30.1@1329,1015
  Bottom Layer w10: v1(2275,864) 2315,824 2315,803.37 2366.37,752 2612.5,752 2637,727.5 2671.5,727.5 2689,745 v4(2779,745)
IO_21: DECODE.2 U2.21 | length 1830.2
  Top Layer w10: U2.21@2732.46,879.21 2879.84,879.21 2906.63,906 2962,906 v2(2963,907) ; v2(4017,895) 4035,877 4035,849.37 4075.19,809.19 4075.19,480.19 DECODE.2@4019,424
  Bottom Layer w10: v2(2963,907) 2996.25,907 3019.25,884 3985,884 3998,897 4015,897 v2(4017,895)
IO_22: DECODE.4 U2.22 | length 1885.4
  Top Layer w10: U2.22@2732.46,898.9 2876.9,898.9 2902,924 2929,924 v2(2936,931) ; v2(4070,918) 4070,837 4095,812 4095,448 DECODE.4@4119,424
  Bottom Layer w10: v2(2936,931) 2973,931 2981,923 3007,923 3030,900 3978,900 3996,918 v2(4070,918)
IOO: C31.2 U4.7 U9.5 | length 1103.6
  Top Layer w20: U9.5@3339,817.1 3339,899 v1(3356,916) ; v1(3838,1043) 3836.56,1044.44 C31.2@3836.56,1254.99 3868.99,1254.99 3884,1270 U4.7@3884,1441.06
  Bottom Layer w20: v1(3356,916) 3356,959 3393,996 3792,996 3838,1042 v1(3838,1043)
KEY1: U2.2
KEY2: U2.3
KEY3: U2.4
NetC1_2: C1.2 U1.2 | length 217.2
  Top Layer w20: U1.2@1788.4,745.15 1788.4,695.6 1819,665 1939.89,665 C1.2@1942.33,662.56
NetC2_1: C2.1 U1.1 | length 114
  Top Layer w20: U1.1@1838.4,745.15 1838.4,794.4 1848.54,804.54 C2.1@1848.54,855
NetC2_2: C2.2 U1.3 | length 131.6
  Top Layer w20: U1.3@1738.4,745.15 1738.4,784.4 1790.98,836.98 C2.2@1790.98,855
NetC3_1: C3.1 U1.4 | length 118.2
  Top Layer w20: U1.4@1688.4,745.15 1688.4,834.93 C3.1@1708.47,855
NetC3_2: C3.2 U1.5 | length 115
  Top Layer w20: U1.5@1638.4,745.15 1638.4,842.49 C3.2@1650.91,855
NetC4_1: C4.1 U1.6 | length 118.1
  Top Layer w20: C4.1@1568.4,855 1588.4,835 U1.6@1588.4,745.15
NetC7_2: 8Mhz.1 C7.2 U2.5 | length 362.8
  Top Layer w8: 8Mhz.1@2474.2,505 2519,505 2544.47,530.47 U2.5@2544.47,671.54
  Top Layer w20: C7.2@2447.97,375 2449,376.03 2449,415 2474.2,440.2 8Mhz.1@2474.2,505
NetC8_2: 8Mhz.2 C8.2 U2.6 | length 351.1
  Top Layer w8: U2.6@2564.16,671.54 2564.16,529.84 2589,505 8Mhz.2@2623.8,505
  Top Layer w20: 8Mhz.2@2623.8,505 2623.8,450.2 2646.56,427.44 C8.2@2646.56,375
NetC32_2: C32.2 U4.6 | length 97.1
  Top Layer w20: U4.6@3834,1441.06 3834,1347.56 C32.2@3836.56,1345
NetC34_2: C34.2 U5.6 | length 110.5
  Top Layer w20: C34.2@726.56,1195 C34.2@729,1197.44 ; C34.2@726.56,1205 726.56,1308.62 U5.6@729,1311.06
NetC35_1: C35.1 L1.1 Q1.S Q3.D R13.2 U6.6 | length 988.3
  Top Layer w20: C35.1@1604.48,1324.07 1768.07,1324.07 1799,1355 U6.6@1799,1443.94 1799,1495 1779,1515 1779,1865 1679,1965 1679,2040 1694,2055 v1(1719,2055)
  other v1: 1760,2055 1719,2102 1760,2102 1719,2162 1760,2162 1754,2250 1822,2250 1875,2250 1940,2250 2005,2250 1754,2297 1817,2297 1880,2297 1943,2297 2006,2297 1754,2357 1817,2357 1880,2357 1943,2357 2006,2357 1754,2417 1822,2417 1876,2417 1941,2417 2006,2417 1691,2472 1756,2472 1821,2472 1874,2473 1939,2473 2004,2473 1509,2475 1574,2475 1639,2475 1691,2532 1756,2532 1821,2532 1874,2533 1939,2533 2004,2533 1509,2535 1574,2535 1639,2535 1691,2592 1756,2592 1821,2592 1874,2593 1939,2593 2004,2593 1509,2595 1574,2595 1639,2595 1874,2643 1509,2645 1691,2652 1756,2652 1939,2653 2004,2653 1574,2655 1639,2655 1821,2662 1691,2712 1756,2712 1821,2712 1874,2713 1939,2713 2004,2713 1509,2715 1574,2715 1639,2715 1691,2772 1756,2772 1821,2772 1874,2773 1939,2773 2004,2773 1509,2775 1574,2775 1639,2775 1691,2832 1756,2832 1821,2832 1874,2833 1939,2833 2004,2833 1509,2835 1574,2835 1639,2835 1507,2889 1567,2889 1627,2889 1687,2889 1747,2889 1807,2889 1867,2889 1937,2892 2002,2892 1937,2952 2002,2952 1507,2954 1567,2954 1627,2954 1687,2954 1747,2954 1807,2954 1867,2954